# EAGLE board pot-boardDesp4 (EAGLE 6.6.0)
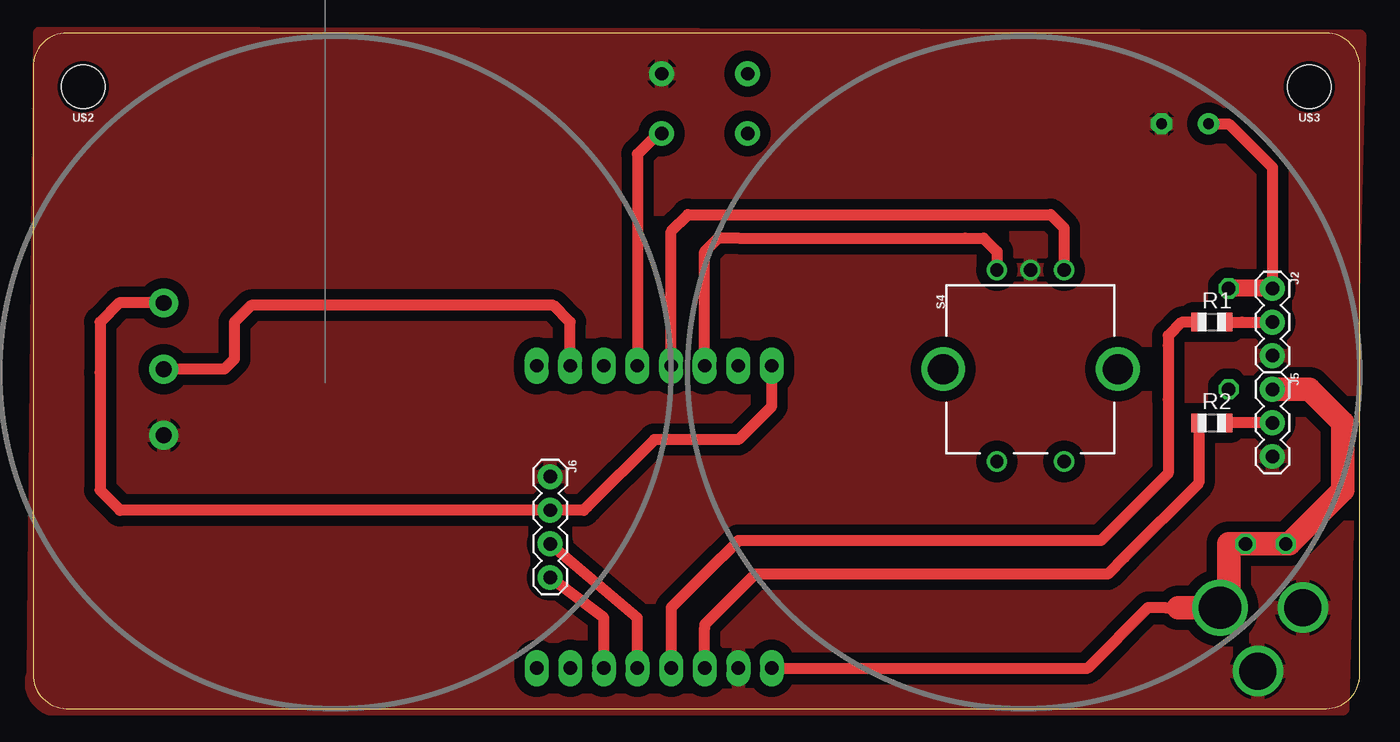
[diagram p0: board, top side]
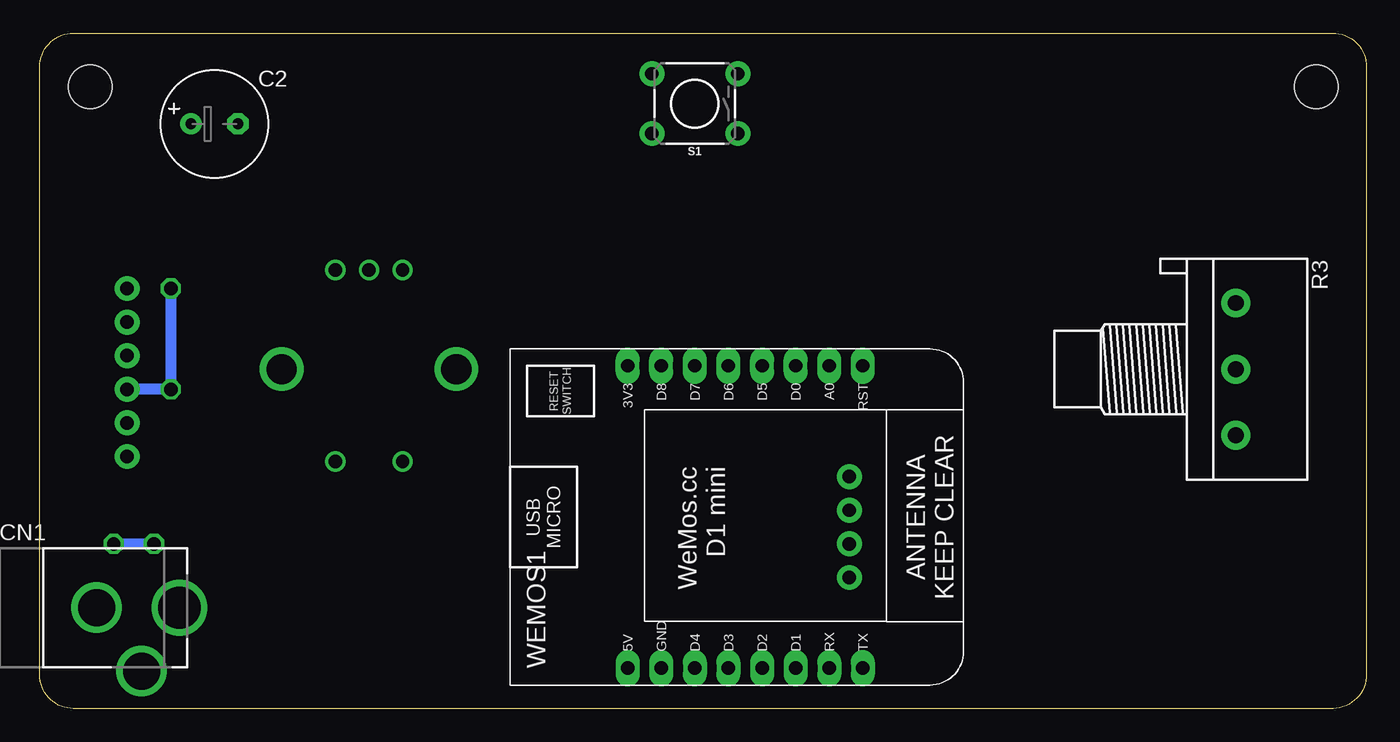
[diagram p1: board, bottom side, seen from below]

Size 100.31 x 51.05 mm. Coordinates in mm from the lower left corner, seen from the top.
Outline: 100.31,2.54 100.31,48.51 arc90 97.77,51.05 2.54,51.05 arc90 0,48.51 0,2.61 arc90 2.52,0 97.77,0 arc90 100.31,2.54
Copper layers (1*16): Top 0.035mm / dielectric 1.5mm / Bottom 0.035mm
Design rules "OthermillDRC_1_32_v2": minimum track width 8mil, minimum drill 0.8mm, track to track 0.794003125mm, track to pad 0.794003125mm, pad to pad 0.794003125mm, via to via 0.794003125mm, smd to smd 0mil, copper to edge 0mil, drill to drill 1mil, minimum pad ring 10mil, minimum via ring 10mil, stop-mask expansion 1mil, vias tented up to drill 30mil, thermal gap 10mil

## Footprints (pad centres in the part's own frame; a part is rotated, then mirrored left to right if it is on the bottom)
E3,5-8 = drill 0.813 pad 1.6: + -1.778,0 | drill 0.813 pad 1.6 octagon: - 1.778,0
DCJACK_2MM_PTH = drill 2.8: GND 0,7.35; GNDBREAK 4.8,10.75 | drill 3.2: PWR 0,13.6
1X03 = drill 1.016 pad 1.88: 1 0,0; 2 2.54,0; 3 5.08,0
1X04 = drill 1.016 pad 1.88: 1 0,0; 2 2.54,0; 3 5.08,0; 4 7.62,0
R0805 = smd 1.1 x 1.4: 1 -1,0; 2 1,0
3RP/1610N = drill 1.2 pad 2.184: 1 -5,0; 2 0,0; 3 5,0
TACTILE_SWITCH_PTH_6.0MM = drill 1.016 pad 1.88: 1 -3.251,2.261; 2 3.251,2.261; 3 -3.251,-2.261; 4 3.251,-2.261
ROTARY_ENC_PLAIN = drill 1.016: A 7.493,-2.54; B 7.493,2.54; C 7.493,0; SW+ -6.985,2.54; SW- -6.985,-2.54 | drill 2.286: P$3 0,6.604; P$4 0,-6.604
STAND-OFF = hole 3.302: 0,0
WEMOS-D1-MINI = drill 1.016 pad 1.829 long: 3V3 -10.16,-10.16; 5V 12.7,-10.16; A0 -10.16,5.08; D0 -10.16,2.54; D1 12.7,2.54; D2 12.7,0; D3 12.7,-2.54; D4 12.7,-5.08; D5 -10.16,0; D6 -10.16,-2.54; D7 -10.16,-5.08; D8 -10.16,-7.62; GND 12.7,-7.62; RESET -10.16,7.62; RX 12.7,5.08; TX 12.7,7.62

## Placement (x,y rotation side)
C2  [E3,5-8]  87.1,44.2 0 bottom
CN1  [DCJACK_2MM_PTH]  103.36,7.62 270 bottom
J2  [1X03]  93.71,31.75 270 top
J5  [1X03]  93.71,24.13 270 top
J6  [1X04]  39.1,17.53 270 top
R1  500  [R0805]  89.13,29.21 0 top
R2  500  [R0805]  89.13,21.59 0 top
R3  [3RP/1610N]  9.89,25.65 270 bottom
S1  tact6mm  [TACTILE_SWITCH_PTH_6.0MM]  50.78,45.72 180 bottom
S4  ENCODER-SWITCH  [ROTARY_ENC_PLAIN]  75.42,25.65 90 top
U$2  [STAND-OFF]  3.79,46.99 180 top
U$3  [STAND-OFF]  96.5,46.99 180 top
WEMOS1  [WEMOS-D1-MINI]  45.7,15.75 270 bottom

## Library data of the parts
C2 CN1 R1 R2 = adafruit
J2 J5 = SparkFun-Connectors
J6 = SparkFun-Connectors; PROD_ID: CONN-09696
R3 = pot
S1 = SparkFun-Switches; PROD_ID: SWCH-08441; SF_SKU: COM-00097
S4 = SparkFun-Switches; SF_SKU: COM-09117
U$2 U$3 = SparkFun-Hardware
WEMOS1 = esp8266modules

## Nets
+3V3: J6.2 R3.1 WEMOS1.3V3
A0: R3.2 WEMOS1.A0
BUTT1: S1.1 WEMOS1.D5
BUTT2: S4.A WEMOS1.D6
BUTT3: S4.B WEMOS1.D7
GND: C2.- CN1.GND CN1.GNDBREAK J2.3 J5.3 J6.1 R3.3 S1.3 S4.C WEMOS1.GND
LED1: R2.1 WEMOS1.D4
LED1O: J5.2 R2.2
LED2: R1.1 WEMOS1.D3
LED2O: J2.2 R1.2
SCL: J6.4 WEMOS1.D1
SDA: J6.3 WEMOS1.D2
VIN: C2.+ CN1.PWR J2.1 J5.1 WEMOS1.5V

## Tracks (layer width: path | path; a pad name or v marks a point on that pad's centre or on a via)
+3V3
  Top 0.813: WEMOS1.3V3 55.86,26.67 55.86,22.86 53.32,20.32 46.97,20.32 41.89,15.24 41.64,14.99 J6.2 6.58,14.99 5.06,16.51 5.06,25.4 5.06,29.21 6.5,30.65 R3.1
A0
  Top 0.813: WEMOS1.A0 40.62,29.21 39.35,30.48 16.49,30.48 15.22,29.21 15.22,26.42 14.46,25.65 R3.2
BUTT1
  Top 0.813: S1.1 47.25,43.18 46.97,43.18 45.7,41.91 WEMOS1.D5
BUTT2
  Top 0.813: WEMOS1.D6 48.24,36.07 49.51,37.34 76.94,37.34 77.96,36.32 S4.A
BUTT3
  Top 0.813: WEMOS1.D7 50.78,34.54 51.8,35.56 53.32,35.56 70.47,35.56 71.86,35.56 72.88,34.54 S4.B
GND
  pour Top: 0.49,51.05 0.01,2.57 arc91 1.28,0 99.04,0 100.31,50.8
LED1
  Top 0.813: WEMOS1.D4 50.78,6.1 50.78,6.35 54.59,10.16 81.26,10.16 82.53,11.43 88.13,17.03 R2.1
LED1O
  Top 0.813: J5.2 R2.2
LED2
  Top 0.813: WEMOS1.D3 48.24,7.62 50.78,10.16 53.32,12.7 55.86,12.7 80.75,12.7 85.83,17.78 85.83,23.37 85.83,27.43 85.83,28.19 86.83,29.19 88.12,29.19 R1.1 | WEMOS1.D3 48.24,2.54 WEMOS1.D3
LED2O
  Top 0.813: R1.2 91.42,29.21 J2.2
SCL
  Top 0.813: WEMOS1.D1 43.16,6.86 J6.4
SDA
  Top 0.813: WEMOS1.D2 45.7,6.86 J6.3
VIN  (via drill 1.02)
  Top 0.813: 86.59,7.62 85.58,7.62 84.31,7.62 79.74,3.05 WEMOS1.5V | C2.+ 90.4,44.2 93.71,40.89 J2.1
  Top 1.27: J2.1 v90.4,31.75 | v94.72,12.45 v91.67,12.45
  Top 1.778: 90.4,7.62 90.4,12.45 91.42,12.45 v91.67,12.45 v94.72,12.45 94.98,12.45 99.04,16.51 99.04,21.59 96.5,24.13 J5.1 | CN1.PWR 90.4,7.62 | 86.59,7.62 90.4,7.62
  Bottom 0.813: v94.72,12.45 v91.67,12.45 | v90.4,31.75 v90.4,24.13 J5.1

## Text on the board
tPlace: ILOVELAMP | pot-boardDesp4